# Altium PCB nixie.PcbDoc
Units mil, origin at the board's own origin, x right, y up, seen from the top; angles counter-clockwise.
Board outline 3200 x 3800 mil, 2 copper layers (Top Layer, Bottom Layer); 49 components, 41 nets, 157 pads, 7 vias.
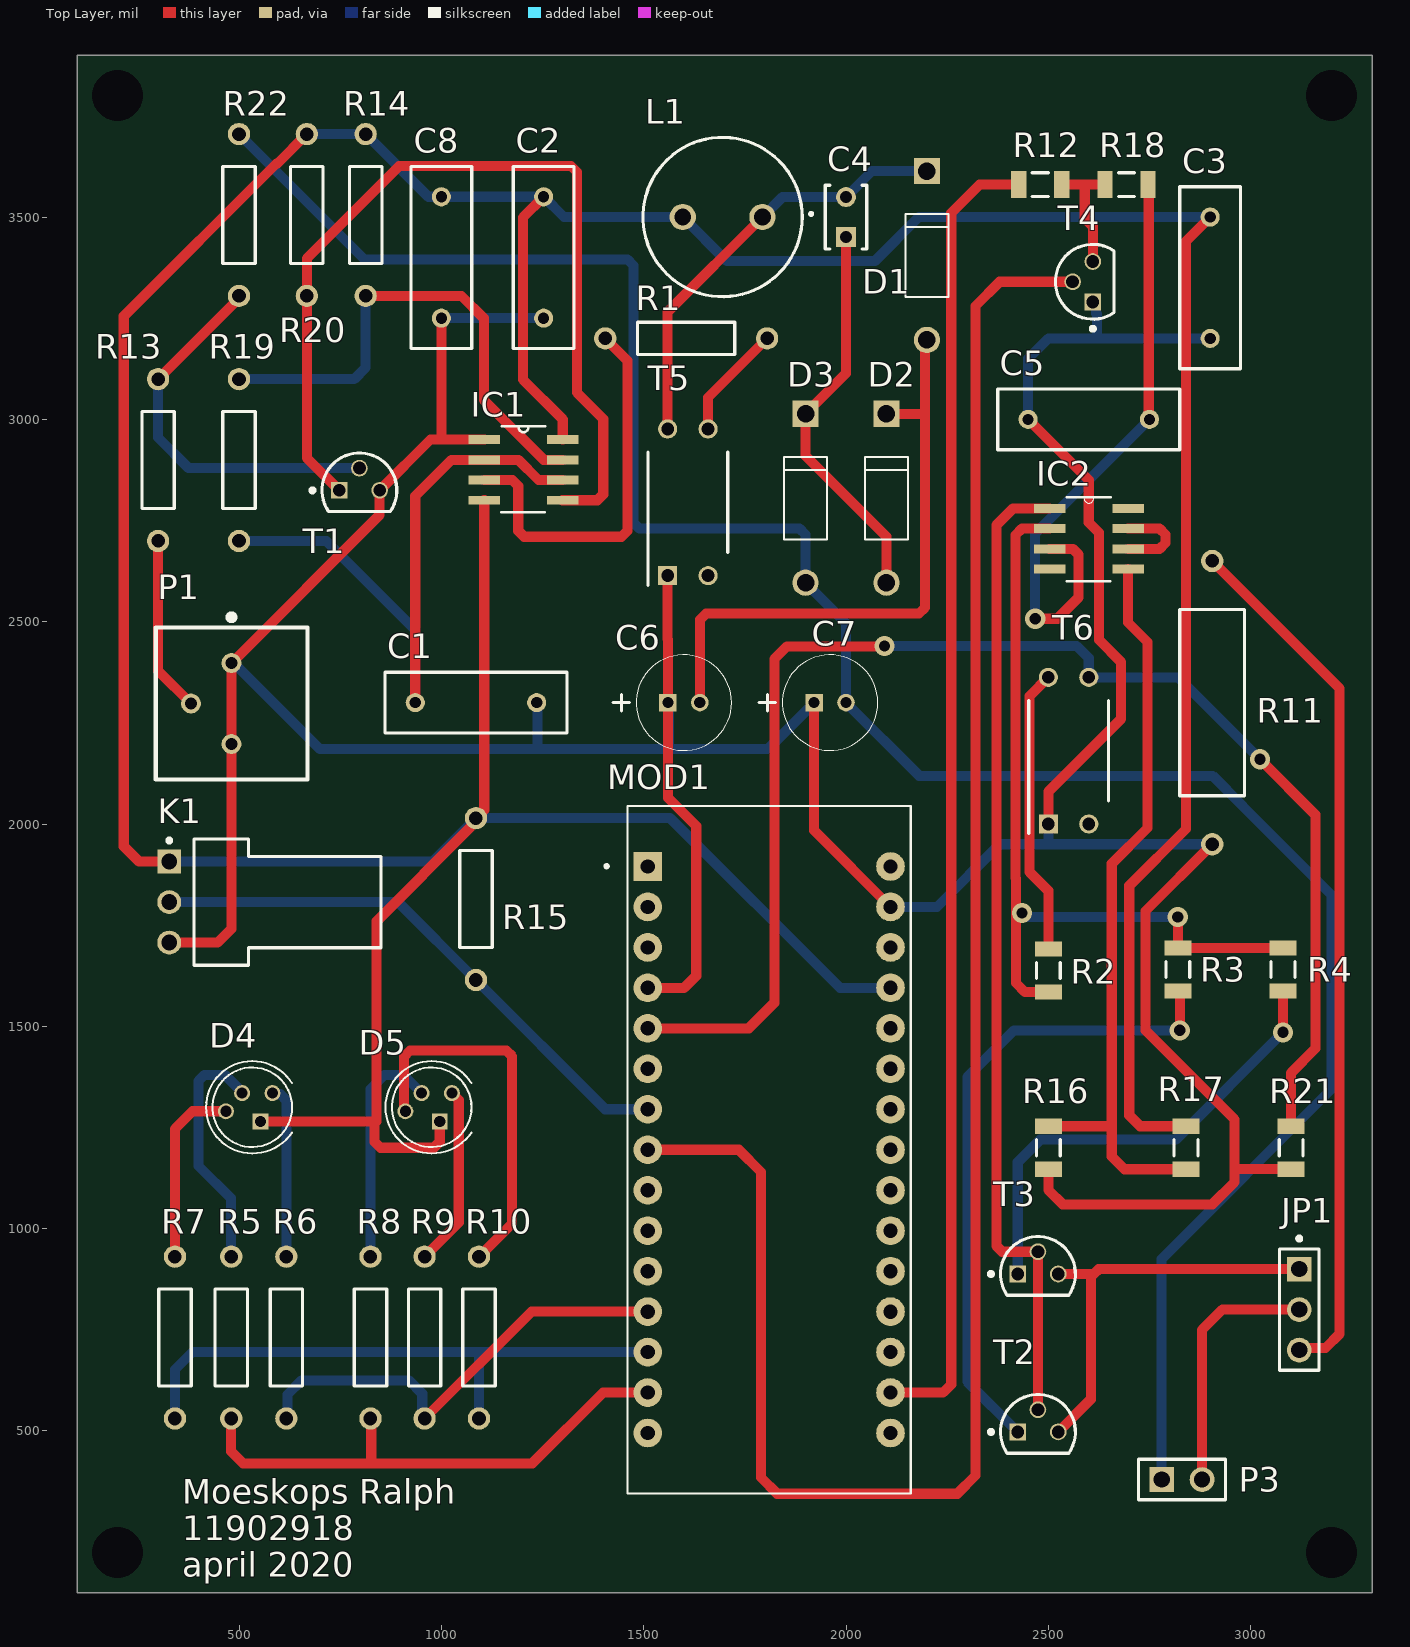
[diagram p0: Top Layer view]
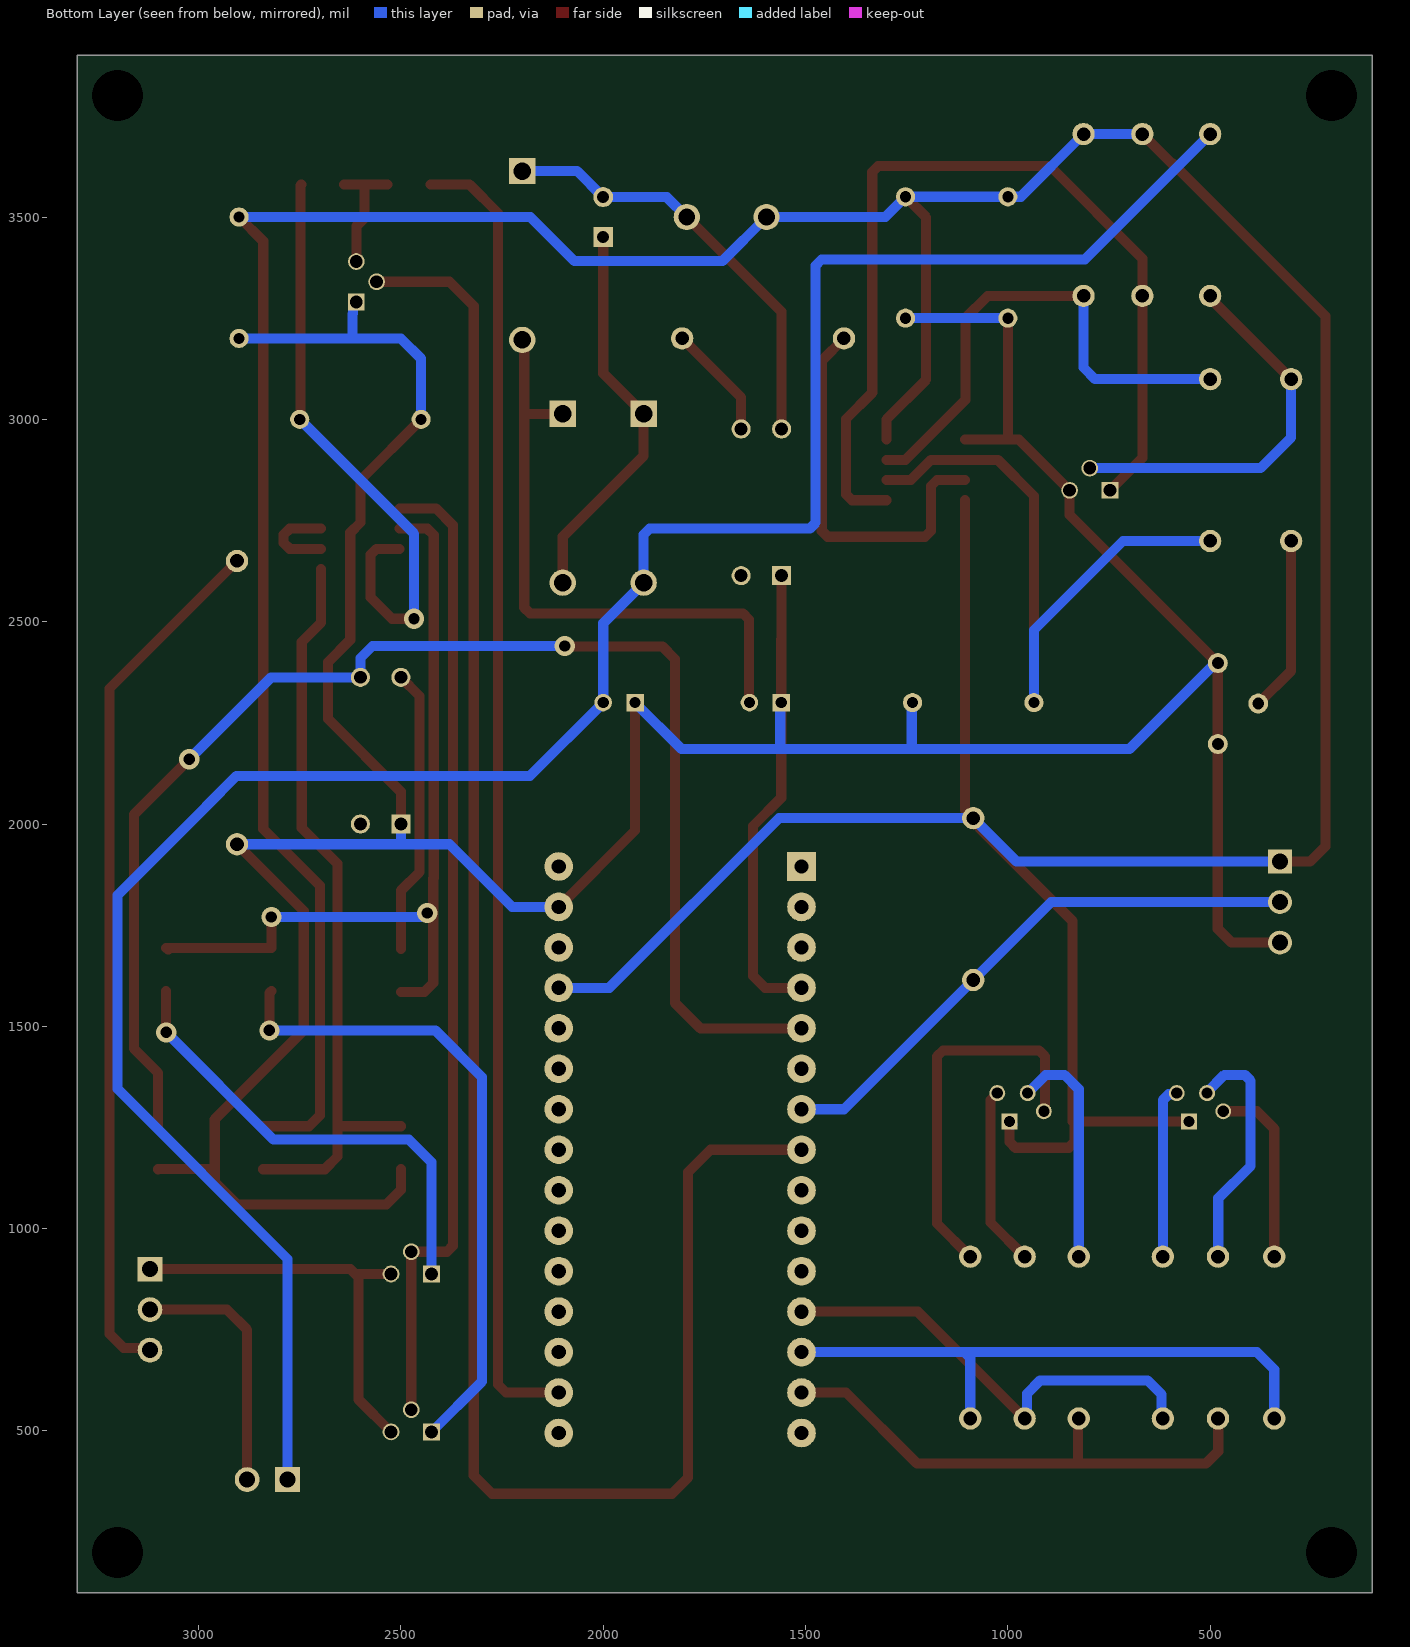
[diagram p1: Bottom Layer view, seen from below]

## Layer stack, top to bottom
Top Solder: solder mask 0.4, Solder Resist, Dk 3.5
Top Layer: signal copper 1.4
Dielectric 1: dielectric 12.6, FR-4, Dk 4.8
Bottom Layer: signal copper 1.4
Bottom Solder: solder mask 0.4, Solder Resist, Dk 3.5

## Board outline
100,100 3300,100 3300,3900 100,3900
cut-out: 5100,700

## Design rules (kind name [scope] priority, off if disabled: settings)
Clearance [All] p1: gap=10 ignorepadtopadclearanceinfootprint=FALSE except(0: Arc-Hole Track-Hole SMDPad-Hole THPad-Hole Via-Hole Fill-Hole Poly-Hole Region-Hole Text-Hole)
HoleSize HoleSize_1 [All] p1: absolutevalues=TRUE maxlimit=200 minlimit=1 maxpercent=80.000 minpercent=20.000
HoleSize [All] p2: absolutevalues=TRUE maxlimit=200 minlimit=1 maxpercent=80.000 minpercent=20.000
PolygonConnect [All] p1: connectstyle=Relief reliefconductorwidth=10 reliefentries=4 polygonreliefangle="90 Angle" airgapwidth=10
RoutingVias [All] p1: holewidth=28 width=50 viastyle="Through Hole" minholewidth=28 minwidth=50 maxholewidth=28 maxwidth=50
SolderMaskExpansion [All] p1: expansion=4 istentingtop=FALSE
Width [All] p1: maxlimit=50 minlimit=25 preferedwidth=25 minimp=50.000000 maximp=50.000000 favimp=50.000000
29 further rules are at their usual default settings.

## Classes and differential pairs
component class Sheet1: C1 C2 C3 C4 C5 C6 C7 C8 D1 D2 D3 IC1 IC2 K1 L1 P3 R1 R2 R3 R4 R5 R6 R7 R8 R9 R10 R11 R12 R13 R14 R15 R16 R17 R18 R19 R20 R21 R22 T1 T2 T4

## Components (designator, comment, footprint, x,y, rotation, side; value= is the part's Value field where it differs from the comment)
C1 "Cap" RAD-0.3 1085.58,2300 r180 top value=1uF
C2 "Cap" RAD-0.3 1252.86,3400 r90 top value=1uF
C3 "Cap" RAD-0.3 2900,3350 r90 top value=1uF
C4 "100V" "Ceramic Capacitor" 2000,3500 r90 top value=1uF
C5 "Cap" RAD-0.3 2600,3000 r0 top value=1uF
C6 "200V" "electrolytic capacitor 2.2uf" 1600,2300 r0 top value=1uF
C7 "200V" "electrolytic capacitor 2.2uf" 1961.26,2300 r0 top value=1uF
C8 "Cap" RAD-0.3 1000,3400 r90 top value=1uF
D1 "MUR160G" MUR160G 2200,3400 r90 top
D2 "MUR160G" MUR160G 2100,2800 r90 top
D3 "MUR160G" MUR160G 1900,2800 r90 top
D4 "RGB LED" "rgb leds" 16132.67,2160 r0 top
D5 "RGB LED" "rgb leds" 16576.09,2160 r0 top
IC1 "M7555" M7555's 1203,2875 r0 top
IC2 "LM6142" LM6142's 2600,2700 r0 top
JP1 "22-28-4033" MOLX-22-28-4033_V 3120,800 r270 top
K1 "61900319521" K1 620.35,1809.48 r90 top
L1 "Inductor" ELC08D470E 1700,3500 r180 top value=47uH
MOD1 "arduino" "ARDUINO NANO" 1800,1200 r0 top
P1 "Component_1" Pot 479.38,2300 r90 top
P3 "TSW-102-26-L-S" SMTC-TSW-102-26-XX-S 2780,380 r0 top
R1 "1%" Resistor 1600,3200 r0 top value=1K
R2 "1%" "SMD resistor" 2500,1638.15 r270 top value=1K
R3 "Res2" "SMD resistor" 2820,1640 r270 top value=1K
R4 "Res2" "SMD resistor" 3080,1640 r270 top value=1K
R5 "Res2" Resistor 480.69,725.83 r90 top value=1K
R6 "Res2" Resistor 616.95,725.83 r90 top value=1K
R7 "Res2" Resistor 341.73,725.83 r90 top value=1K
R8 "Res2" Resistor 824.86,725.83 r90 top value=1K
R9 "Res2" Resistor 958.52,725.83 r90 top value=1K
R10 "Res2" Resistor 1093.07,725.83 r90 top value=1K
R11 "1W" "RESISTOR 1W" 2900,2300 r90 top value=1K
R12 "1%" "SMD resistor" 2480,3580 r180 top value=1K
R13 "1%" Resistor 300,2894.42 r90 top value=1K
R14 "Res2" Resistor 812.98,3500 r90 top value=1K
R15 "Res2" Resistor 1085.58,1809.48 r90 top value=1K
R16 "1%" "SMD resistor" 2500,1200 r90 top value=1K
R17 "1%" "SMD resistor" 2840,1200 r90 top value=1K
R18 "1%" "SMD resistor" 2693.15,3580 r0 top value=1K
R19 "Res2" Resistor 500,2894.42 r90 top value=1K
R20 "Res2" Resistor 667.6,3500 r90 top value=1K
R21 "1%" "SMD resistor" 3100,1200 r90 top value=1K
R22 "1%" Resistor 500,3500 r90 top value=1K
T1 "BC547B" BC547B 797.51,2859.48 r0 top
T2 "MPSA42" MPSA42 2474.36,532.64 r0 top
T3 "MPSA42" MPSA42 2474.36,922.99 r0 top
T4 "2N7000" 2N7000 2580,3340 r90 top
T5 "IRLD110" IRLD110 1609.21,2800 r90 top
T6 "IRLD110" IRLD110 2550,2186.18 r90 top

## Footprints (in the part's own frame and the unit in brackets; to place one, negate y for a bottom-side part, rotate by r counter-clockwise, add the part's x,y. Pads: shape width x height; smd on the part's side, far side on the other; paste and mask are expansions set on the pad)
2N7000 [mm]
  rect 1.05x1.05 hole 0.8: 1(-1.27,-0.762)
  round 1.05 hole 0.8: 2(0,0.508) 3(1.27,-0.762)
  silkscreen extent -3.07,-2.1 2.35,1.58, body extent -2.35,-2.1 2.36,1.6, height 7.87
"ARDUINO NANO" [mm]
  rect 1.8x1.8 hole 0.9: 1(-7.366,17.653)
  round 1.8 hole 0.9: 2(-7.366,15.113) 3(-7.366,12.573) 4(-7.366,10.033) 5(-7.366,7.493) 6(-7.366,4.953) 7(-7.366,2.413) 8(-7.366,-0.127) 9(-7.366,-2.667) 10(-7.366,-5.207) 11(-7.366,-7.747) 12(-7.366,-10.287) 13(-7.366,-12.827) 14(-7.366,-15.367) 15(-7.366,-17.907) 16(7.874,-17.907) 17(7.874,-15.367) 18(7.874,-12.827) 19(7.874,-10.287) 20(7.874,-7.747) 21(7.874,-5.207) 22(7.874,-2.667) 23(7.874,-0.127) 24(7.874,2.413) 25(7.874,4.953) 26(7.874,7.493) 27(7.874,10.033) 28(7.874,12.573) 29(7.874,15.113) 30(7.874,17.653)
  silkscreen extent -10.05,-21.72 9.14,21.46
BC547B [mm]
  rect 1.05x1.05 hole 0.8: 1(-1.27,-0.889)
  round 1.05 hole 0.8: 2(0,0.508) 3(1.27,-0.889)
  silkscreen extent -3.07,-2.22 2.35,1.46, body extent -2.35,-2.22 2.36,1.47, height 7.87
"Ceramic Capacitor" [mm] "Radial Cap, Thru-Hole; 2 Leads; 0.3 in Pin Spacing"
  rect 1.25x1.25 hole 0.75: 1(-1.25,0)
  round 1.25 hole 0.75: 2(1.25,0)
  silkscreen extent -2,-1.3 2,1.3, body extent -2,-1.3 2,1.3, height 5.6
ELC08D470E [mm] "Chip Inductor, Body 1.0x0.5mm, IPC High Density"
  round 1.65 hole 1.05: 1(-2.373,0) 2(2.627,0)
  silkscreen extent -5.52,-5 5.12,5
"electrolytic capacitor 2.2uf" [mm] "Radial Cap, Thru-Hole; 2 Leads; 0.3 in Pin Spacing"
  rect 1.1x1.1 hole 0.7: 1(-1.016,0)
  round 1.1 hole 0.7: 2(0.984,0)
  silkscreen extent -4.46,-3 2.98,3
IRLD110 [mm]
  rect 1.2x1.2 hole 0.8: 1(-4.729,1.27)
  round 1.2 hole 0.8: 2(4.475,-1.27) 3(4.475,1.27) ""(-4.729,-1.27)
  silkscreen extent -5.33,-2.5 3.02,2.5, body extent -4.88,-2.45 4.63,2.45, height 3.37
K1 [mm]
  rect 1.5x1.5 hole 1: 1(2.474,7.437)
  round 1.5 hole 1: 2(-0.066,7.437) 3(-2.606,7.437)
  silkscreen extent -4.03,-5.86 3.93,7.56, body extent -3.88,-5.73 3.74,7.79, height 5.83
LM6142's [mil]
  rect 78x22 smd: 1(-97,80) 2(-97,30) 3(-97,-20) 4(-97,-70) 5(97,-70) 6(97,-20) 7(97,30) 8(97,80)
  silkscreen extent -55,-100 54,108
M7555's [mil]
  rect 78x22 smd: 1(-97,75) 2(-97,25) 3(-97,-25) 4(-97,-75) 5(97,-75) 6(97,-25) 7(97,25) 8(97,75)
  silkscreen extent -55,-105 54,108
MOLX-22-28-4033_V [mm] "THD, 3-Leads, Body 7.62x2.49mm, Pitch 2.54mm"
  rect 1.55x1.55 hole 1.02: 1(-2.54,0)
  round 1.55 hole 1.02: 2(0,0) 3(2.54,0)
  silkscreen extent -4.58,-1.24 3.81,1.25, body extent -3.81,-1.24 3.81,1.24, height 8.38
MPSA42 [mm]
  rect 1.05x1.05 hole 0.8: 1(-1.27,-0.889)
  round 1.05 hole 0.8: 2(0,0.508) 3(1.27,-0.889)
  silkscreen extent -3.07,-2.22 2.35,1.46, body extent -2.35,-2.22 2.36,1.47, height 7.87
MUR160G [mm]
  round 1.65 hole 1.1: 1(-5.173,0)
  rect 1.65x1.65 hole 1.1: 2(5.427,0)
  silkscreen extent -2.47,-1.35 2.73,1.35
Pot [mm]
  round 1.25 hole 0.75: 1(2.479,-0.046) 2(-0.061,2.494) 3(-2.601,-0.046)
  silkscreen extent -4.83,-4.83 5.53,4.7, body extent -4.83,-4.83 4.75,4.75, height 10.9
RAD-0.3 [mm] "Radial Cap, Thru-Hole; 2 Leads; 0.3 in Pin Spacing"
  round 1.2 hole 0.7: 1(-3.81,0) 2(3.81,0)
  silkscreen extent -5.72,-1.91 5.71,1.9
Resistor [mm]
  round 1.4 hole 0.85: 1(-4.953,0) 2(5.207,0)
  silkscreen extent -2.92,-1.02 3.17,1.02
"RESISTOR 1W" [mm]
  round 1.4 hole 0.85: 1(-8.89,-0.127) 2(8.89,-0.127)
  silkscreen extent -5.84,-2.16 5.84,1.91
"rgb leds" [mm]
  round 1 hole 0.7: B(-396.875,-20.955) G(-397.891,-22.098) R(-394.97,-20.955)
  rect 1x1 hole 0.7: C(-395.732,-22.733)
  silkscreen extent -399.14,-24.74 -393.74,-18.94
"SMD resistor" [mm] "Axial Device, Thru-Hole; 2 Leads; 0.4 in Pin Spacing"
  rect 0.95x1.7 smd: 1(-1.35,0) 2(1.35,0)
  silkscreen extent -0.5,-0.75 0.5,0.75, body extent -1.67,-0.87 1.67,0.87, height 0.75
SMTC-TSW-102-26-XX-S [mm] ".025 SQ Post Terminal Strip Assembly, 1x2 Pins, Vertical, 2.54mm Pitch, Male"
  rect 1.55x1.55 hole 1.02: 1(0,0)
  round 1.55 hole 1.02: 2(2.54,0)
  silkscreen extent -1.46,-1.27 4,1.27, body extent -1.4,-1.27 3.81,1.27, height 8.38

## Part data
C1 C2 C3 C5 C8: library part Capacitor, "Capacitor", LatestRevisionDate=17-Jul-2002, LatestRevisionNote="Re-released for DXP Platform.", PackageDescription="Radial Cap, Thru-Hole; 2 Leads; 0.3 in Pin Spacing", PackageReference=RAD-0.3, Published=8-Jun-2000, Publisher="Altium Limited"
C4: library part Capacitor, "Capacitor / 100V", LatestRevisionDate=17-Jul-2002, LatestRevisionNote="Re-released for DXP Platform.", PackageDescription="Radial Cap, Thru-Hole; 2 Leads; 0.3 in Pin Spacing", PackageReference=RAD-0.3, Published=8-Jun-2000, Publisher="Altium Limited"
C6 C7: library part C1uF, "Capacitor", LatestRevisionDate=17-Jul-2002, LatestRevisionNote="Re-released for DXP Platform.", PackageDescription="Radial Cap, Thru-Hole; 2 Leads; 0.3 in Pin Spacing", PackageReference=RAD-0.3, Published=8-Jun-2000, Publisher="Altium Limited"
D1 D2 D3: library part Diode, "Diode", Manufacturer="ON Semiconductor", ComponentLink1Description="Manufacturer URL", ComponentLink1URL=http://www.onsemi.com/, ComponentLink2Description=Datasheet, ComponentLink2URL=http://www.onsemi.com/pub_link/Collateral/MUR120-D.PDF, ComponentLink3Description="Package Specification", ComponentLink3URL=http://www.onsemi.cn/pub_link/Collateral/59-10.PDF, DatasheetVersion="Rev. 12", IFSM Max (A)=35, Manufacturer Part Number=MUR160G, Mounting Technology="Through Hole", PackageDescription="2-Pin, Axial Lead, Diameter 2.35 mm", PackageReference=AXIAL_LEAD-2-59-10, PackageVersion="Rev. U, 02/2005", Packing="Bulk Bag", PartNumber=MUR160G, RoHS=TRUE, Type=Ultrafast, VRRM Max (V)=600
D4 D5: "RGB Led"
IC1: "IC", Case/Package=SOIC, Frequency=1MHz, High Level Output Current=-800uA, Low Level Output Current=20mA, Manufacturer=Intersil, Manufacturer Part Number=ICM7555CBAZ-T, Max Operating Temperature=70°C, Max Supply Voltage=18V, Min Operating Temperature=0°C, Min Supply Voltage=2V, Operating Supply Current=60uA, Package="SOIC-8 Intersil", Package Quantity=2500, Availability=Unavailable, Category="Clock and Timing", ComponentLink1Description=https://datasheet.ciiva.com/6667/fn2867-6667943.pdf?src-supplier=Digi-Key, ComponentLink1URL=https://datasheet.ciiva.com/6667/fn2867-6667943.pdf?src-supplier=Digi-Key, ComponentLink2Description=https://datasheet.ciiva.com/6667/fn2867-6667945.pdf?src-supplier=Digi-Key, ComponentLink2URL=https://datasheet.ciiva.com/6667/fn2867-6667945.pdf?src-supplier=Digi-Key, ComponentLink3Description=https://datasheet.ciiva.com/6667/fn2867-6667947.pdf?src-supplier=Digi-Key, ComponentLink3URL=https://datasheet.ciiva.com/6667/fn2867-6667947.pdf?src-supplier=Digi-Key, Contact Plating=Tin,Matte, Lead Free="Lead Free", MF="Renesas Electronics", Mount="Surface Mount", MP=ICM7555CBAZ, Number of Pins=8, Number of Timers/Counters=1, Packaging="Tape and Reel", Price=None, Pricing 1="2500=0,25401, 5000=0,24643, 10000=0,23930, 15000=0,23256, 25000=0,22947 (USD)", Radiation Hardening=No, RoHS=Yes, SnapEDA_Link=https://www.snapeda.com/parts/ICM7555CBAZ/Renesas%20Electronics%20America%20Inc./view-part/931/?ref=snap, Supplier 1=Avnet, Supplier Part Number 1=ICM7555CBAZ-T
IC2: library part LM6412, "IC", Manufacturer="TI National Semiconductor", Manufacturer Part Number=LM6142AIM, Package Reference=D0008A, PackageTopMarking=NSZXTT*LM614*2AIM, PowerWise=N, Code_IPC=SOIC127P600-8, Code_JEDEC=MS-012-AA, ComponentLink1Description="Datasheet URL", ComponentLink1URL=http://www.ti.com/general/docs/lit/getliterature.tsp?genericPartNumber=LM6142&fileType=pdf, CompType=Amplifiers, PackageDescription="SOIC Narrow, 4.9 x 3.9 x 1.45mm, 8 Lead, 1.27mm Pitch", PinCount=8, RoHS=N
JP1: library part CMP-1676-00001-5, "Male Header, Pitch 2.54 mm, 1 x 3 Position, Height 8.38 mm, Tail Length 3.18 mm, RoHS, Bulk", Colour=Black, Current Rating="4 A", Manufacturer=Molex, Max Operating Temperature="75 degC", Min Operating Temperature="0 degC", Package Quantity=1, Voltage Rating="250 V", ComponentLink1Description="Manufacturer URL", ComponentLink1URL=http://www.molex.com/, ComponentLink2Description=Datasheet, ComponentLink2URL=http://www.molex.com/pdm_docs/sd/022284033_sd.pdf, Contact Finish=Gold, Contact Material=Brass, Contact Plating=Gold, DatasheetVersion="Rev. G, 01/2012", Height="8.38 mm", Lead Pitch="0.1 inch", Length="7.62 mm", Mount="Through Hole", Mounting Technology="Through Hole", PackageDescription="Male Header, Pitch 2.54 mm, 1 x 3 Position, Height 8.38 mm, Tail Length 3.18 mm", PackageReference=22-28-4033, Packaging=Bulk, Pins=3, REACH SVHC=Unknown, RoHSCompliant=true, Rows=1
K1: library part K1, "Connector", Contact Resistance=20mOhm, Manufacturer="Wurth Electronics", Operating Temperature=-40to105degC, Working Voltage=250VAC, Datasheet URL=https://katalog.we-online.de/em/datasheet/6190xx19521.pdf, Gender=Male, Manufacturer Part Number=61900319521, Manufacturer URL=http://www.we-online.de, Mounting Technology=THT, Orientation=RightAngled, Package Reference=61900319521, Packaging=Bag, Part Number=61900319521, Pitch=2.54mm, Position=1x3, Publisher=WurthElektronik
P3: library part CMP-1024-00330-1, "0.025\" SQ Post Header, Through-hole, Vertical, -55 to 125 degC, 2.54 mm Pitch, 2-Pin, Male, RoHS", Manufacturer=Samtec, Temperature Range="-55 to 125 degC", ComponentLink1Description="Manufacturer URL", ComponentLink1URL=http://www.samtec.com, ComponentLink2Description=Datasheet, ComponentLink2URL=http://www.samtec.com/documents/webfiles/pdf/TSW_TH.PDF, ComponentLink3Description="Package Specification", ComponentLink3URL=http://www.samtec.com/documents/webfiles/cpdf/TSW-XXX-XX-XXX-X-XX-XXX-MKT.pdf, DatasheetVersion=F-214, Mounting Technology=Through-hole, Orientation=Vertical, PackageDescription=".025[0.64] SQ. Post Terminal Strip Assembly", PackageReference=TSW-102-26-XX-S, PackageVersion="DM, 8/1988", PartNumber=TSW-102-26-L-S, Pitch="2.54 mm", RoHS=True
R1 R11 R12 R16 R17 R18 R21 R22: library part Resistor, "Resistor", LatestRevisionDate=17-Jul-2002, LatestRevisionNote="Re-released for DXP Platform.", PackageDescription="Axial Device, Thru-Hole; 2 Leads; 0.4 in Pin Spacing", PackageReference=AXIAL-0.4, Published=8-Jun-2000, Publisher="Altium Limited"
R2 R13: library part Res2, "Resistor", LatestRevisionDate=17-Jul-2002, LatestRevisionNote="Re-released for DXP Platform.", PackageDescription="Axial Device, Thru-Hole; 2 Leads; 0.4 in Pin Spacing", PackageReference=AXIAL-0.4, Published=8-Jun-2000, Publisher="Altium Limited"
R3 R4 R5 R6 R7 R8 R9 R10 R14 R15 R19 R20: "Resistor", LatestRevisionDate=17-Jul-2002, LatestRevisionNote="Re-released for DXP Platform.", PackageDescription="Axial Device, Thru-Hole; 2 Leads; 0.4 in Pin Spacing", PackageReference=AXIAL-0.4, Published=8-Jun-2000, Publisher="Altium Limited"
T1 T2 T3: "Transistor", Manufacturer="ON Semiconductor / Fairchild", ComponentLink1Description="Manufacturer URL", ComponentLink1URL=http://www.onsemi.com/, ComponentLink2Description=Datasheet, ComponentLink3Description="Package Specification", ComponentLink3URL=http://www.onsemi.cn/pub_link/Collateral/2N6426-D.PDF, Mounting Technology="Through Hole", PackageDescription="3-Pin Transistor Outline, Body 4.825 x 3.685 mm, Pitch 1.27 mm", PackageReference=TO-92-3-29-11_AM_SL, PackageVersion="Rev. AM", Packing="Bulk Box", Polarity=NPN, RoHS=FALSE
  T1: ComponentLink2URL=http://www.onsemi.com/pub_link/Collateral/BC546-D.PDF, DatasheetVersion="Rev. 7", fT Min (MHz)=150, IC Continuous (A)=0.1, Manufacturer Part Number=BC547B, PartNumber=BC547B
  T2 T3: ComponentLink2URL=http://www.onsemi.cn/pub_link/Collateral/MPSA42-D.PDF, DatasheetVersion="Rev. 8", fT Min (MHz)=50, IC Continuous (A)=0.5, Manufacturer Part Number=MPSA42, Note1=0, PartNumber=MPSA42
T4: library part IC2N7000, "Transistor", Manufacturer="ON Semiconductor / Fairchild", Package Type=TO-92, Channel Polarity="N Channel", Ciss Typ (pF)=60, ComponentLink1Description="Manufacturer URL", ComponentLink1URL=http://www.onsemi.com/, ComponentLink2Description=Datasheet, ComponentLink2URL=http://www.onsemi.com/pub_link/Collateral/2N7000-D.PDF, ComponentLink3Description="Package Specification", ComponentLink3URL=http://www.onsemi.cn/pub_link/Collateral/2N6426-D.PDF, Configuration=Single, Coss Typ (pF)=25, Crss Typ (pF)=5, DatasheetVersion="Rev. 8", ID Max (A)=0.2, Manufacturer Part Number=2N7000, Mounting Technology="Through Hole", PackageDescription="3-Pin Transistor Outline, Body 4.825 x 3.685 mm, Pitch 1.27 mm", PackageReference=TO-92-3-29-11_AM_SL, PackageVersion="Rev. AM", Packing="Bulk Box", PartNumber=2N7000, PD Max (W)=0.35, V(BR)DSS Min (V)=60, VGS Max (V)=20, VGS(th) Max (V)=3
T5 T6: "Transistor", Supplier Part Number 1=IRLD110PBF-ND, Supplier 1=Digi-Key
L1: Code_IEC=1005, Code_JEITA=0402, LatestRevisionDate=29-May-2009, LatestRevisionNote="IPC-7351 Footprint Added.", PackageDescription="Chip Inductor", PackageReference=0402-A, Published=8-Jun-2000, Publisher="Altium Limited"

## Free pads (board coordinates)
  round 60 hole 126: 2(200,3800) 3(200,200) 4(3200,200) 5(3200,3800)

## Via types
v1: diameter 50, hole 28, Top Layer to Bottom Layer, 7 vias

## Nets (pads, with @x,y where several pads share a name; then routed paths per layer and width w, separated by ;. In a path a pad name is that pad's centre, name@x,y a point inside that pad or via, vN(x,y) a via of type N, cw(c..) or ccw(c..) an arc to the next point about the centre after c; other vN are vias at no path point)
+3V3: MOD1.17 R12.2 | length 3249.1
  Top Layer w25: MOD1.17 2240,595 2260,615 2260,3510 2330,3580 2420,3580 R12.2
+5V: C2.2 C3.2 C8.2 D4.C D5.C IC1.4 IC1.8 K1.1 L1.2 MOD1.27 R14.2 R15.2 R17.2 R20.2 | length 11818
  Top Layer w25: K1.1 253.13,1906.87 215,1945 215,3255 592.4,3632.4 595,3632.4 R20.2 ; D4.C 840,1265 840,1760 1070.52,1990.52 1070.52,1991.27 1085.58,2006.33 R15.2 1106,2034.9 IC1.4 ; 835,1265 835,1214.64 849.64,1200 981.45,1200 996.09,1214.64 D5.C ; C2.2 1202,3499.14 1202,3098 1300,3000 IC1.8 ; R17.2 2726.85,1253.15 2700,1280 2700,1847.74 2840,1987.74 2840,3440 C3.2
  Bottom Layer w25: K1.1 977.97,1906.87 R15.2 1565.52,2014.48 1985,1595 MOD1.27 ; R20.2 R14.2 967.99,3550 C8.2 C2.2 1302.86,3500 L1.2 1705.58,3391 2071,3391 2180,3500 C3.2 ; D5.C@988.9,1257.81 D5.C
+150V: C7.2 D3.1 P3.1 R22.2 | length 5654.8
  Bottom Layer w25: R22.2 810,3395 1460.36,3395 1475,3380.36 1475,2744.64 1489.64,2730 1885.36,2730 1900,2715.36 D3.1 2000,2496.34 C7.2 2181,2119 2906,2119 2980,2045 2980,2044.64 3200,1824.64 3200,1345 2780,925 P3.1
GND: C1.1 C2.1 C3.1 C5.1 C6.1 C7.1 C8.1 IC1.1 K1.3 MOD1.4 MOD1.29 P1.1 P1.3 R11.1 R16.1 R21.1 T1.3 T4.1 T5.1 T6.1 | length 10291.9
  Top Layer w25: K1.3 446.87,1706.87 481.19,1741.19 P1.3 P1.1 847.51,2763.93 T1.3@847.51,2827.51 ; T1.3 973.03,2950 1000.3,2950 ; C8.1 1000,2950.3 1000.3,2950 ; IC1.1 1000.3,2950 ; MOD1.4 1600,1595 1630,1625 1630,1995 1560,2065 C6.1 1560,2456 1559.21,2456.79 T5.1 ; C7.1 1921.26,1983.74 MOD1.29 ; C5.1 2600,2850 2600,2745 2625,2720 2625,2455 2680,2400 2680,2260 2500,2080 T6.1 ; R16.1 2500,1095.61 2535.61,1060 2905.15,1060 2960,1114.85 2960,1147.73 ; R11.1 2740,1785 2740,1490 2960,1270 2960,1147.73 ; R21.1 3099.12,1147.73 2960,1147.73
  Bottom Layer w25: P1.1 487.4,2397.6 700,2185 1237.55,2185 ; C8.1 C2.1 ; C1.1 1237.55,2298.03 1237.55,2185 ; C6.1 1562.56,2297.44 1562.56,2185 ; C7.1 1806.26,2185 1562.56,2185 ; MOD1.29 2225,1795 2380,1950 2497.74,1950 ; C5.1 2450,3150 2500,3200 2613.58,3200 ; T6.1 2500,1952.26 2497.74,1950 ; T4.1 2618.17,3281.83 2618.17,3261.83 2620,3260 2620,3206.42 2613.58,3200 ; C3.1 2613.58,3200 ; R11.1 2497.74,1950 ; 1237.55,2185 1562.56,2185
NetC1_2: C1.2 IC1.2 IC1.6 R19.1 | length 1638.9
  Top Layer w25: C1.2 935.58,2810.58 1025,2900 IC1.2 1190,2900 1240,2850 IC1.6
  Bottom Layer w25: R19.1 715.58,2699.42 935.58,2479.42 C1.2
NetC4_1: C4.1 D2.1 D3.2 | length 978.7
  Top Layer w25: C4.1 2000,3113.66 D3.2 1900,2910 2100,2710 D2.1
NetC4_2: C4.2 D1.2 L1.1 T5.3 | length 1074.5
  Top Layer w25: T5.3 1559.21,3265.79 L1.1
  Bottom Layer w25: L1.1 1842.64,3549.21 C4.2 2064.45,3613.66 D1.2
NetC5_2: C5.2 IC2.3 R18.2 | length 1504.6
  Top Layer w25: v1(2467.5,2507.12) 2522.12,2507.12 2575,2560 2575,2665.36 2560.36,2680 IC2.3 ; R18.2 2748.15,3578.15 2748.15,3001.85 C5.2
  Bottom Layer w25: v1(2467.5,2507.12) 2467.12,2507.5 2467.12,2717.12 C5.2
NetC6_2: C6.2 D1.1 D2.2 | length 1532
  Top Layer w25: C6.2 1639.64,2300.9 1639.64,2505.36 1654.29,2520 2180.36,2520 2195,2534.64 2195,3013.66 ; D2.2 2195,3013.66 ; D1.1 2195,3191.34 2195,3013.66
NetD4_B: D4.B R5.2 | length 605.6
  Top Layer w25: D4.B D4.B@510.42,1332.25
  Bottom Layer w25: R5.2 480,931.52 480,1075 400,1155 400,1365.36 414.64,1380 465,1380 507.67,1337.33 D4.B
NetD4_G: D4.G R7.2 | length 459.8
  Top Layer w25: R7.2 341.73,1246.73 385,1290 D4.G
NetD4_R: D4.R R6.2 | length 428.3
  Bottom Layer w25: D4.R 585.42,1332.25 602.31,1332.25 616.95,1317.61 R6.2
NetD5_B: D5.B R8.2 | length 573.2
  Bottom Layer w25: R8.2 824.86,1344.86 859.64,1379.64 906.45,1379.64 D5.B
NetD5_G: D5.G R10.2 | length 944.9
  Top Layer w25: D5.G 908.34,1292.75 908.34,1302.91 908,1303.25 908,1425.71 922.64,1440.36 1160.36,1440.36 1175,1425.71 1175,1012.76 R10.2
NetD5_R: D5.R R9.2 | length 446.2
  Top Layer w25: R9.2 1043,1015.32 1043,1318.09 D5.R
NetDS18B20_1: 
NetDS18B20_2: 
NetDS18B20_3: 
NetIC1_3: IC1.3 R1.1 | length 981
  Top Layer w25: IC1.3 1175.36,2850 1190,2835.36 1190,2724.64 1204.64,2710 1445.36,2710 1460,2724.64 1460,3145 R1.1
NetIC1_5: IC1.5 R20.1 T1.1 | length 2304
  Top Layer w25: T1.1 667.6,2904.39 R20.1 667.6,3397.6 896,3626 1320.36,3626 1335,3611.36 1335,3066 1400,3001 1400,2814.64 1385.36,2800 IC1.5
NetIC1_7: IC1.7 R14.1 R19.2 | length 1274.9
  Top Layer w25: R14.1 1050,3305 1105,3250 1105,3048 1253,2900 IC1.7
  Bottom Layer w25: R19.2 784.42,3099.42 812.99,3127.99 R14.1
NetIC2_1: IC2.1 T2.2 T3.2 | length 2428.8
  Top Layer w25: T2.2 2474.36,747 T3.2 2386.14,942.99 2371.5,957.64 2371.5,2738.5 2413,2780 IC2.1
NetIC2_2: IC2.2 R2.2 R3.1 R4.1 | length 2017.2
  Top Layer w25: v1@2420,1780 2420,1606.96 2441.96,1585 R2.2 ; v1(2435,1780) 2435,1775 2429.85,1780.15 2420,1780.15 2420,1865.5 2418.88,1866.62 2418.88,2714.23 2434.64,2730 IC2.2 ; v1(2820,1770) R3.1 3071.85,1693.15 3075,1690 3078.15,1693.15 R4.1
  Bottom Layer w25: v1@2451.77,1770 v1(2820,1770)
NetIC2_5: IC2.5 R16.2 R17.1 | length 1861.2
  Top Layer w25: R16.2 2656.72,1253.15 ; IC2.5 2697,2498 2745,2450 2745,1990 2656.74,1901.74 2656.74,1253.12 2656.74,1178.26 2688.15,1146.85 R17.1
NetIC2_6: IC2.6 IC2.7 | length 218.1
  Top Layer w25: IC2.6 2775,2680 2789.64,2694.64 2789.64,2715.36 2775,2730 IC2.7
NetJP1_1: JP1.1 T2.3 T3.3 | length 1027.4
  Top Layer w25: T2.3 2605,578.28 2605,880.59 2612.4,887.99 ; T3.3 2612.4,887.99 ; JP1.1 2624.41,900 2612.4,887.99
NetJP1_2: JP1.2 P3.2 | length 637.8
  Top Layer w25: P3.2 2885,380 2880,385 2880,750 2930,800 JP1.2
NetJP1_3: JP1.3 R11.2 | length 2157
  Top Layer w25: R11.2 3220,2335 3220,740 3185,705 3125,705 JP1.3
NetK1_2: K1.2 MOD1.7 R15.1 | length 1394.5
  Bottom Layer w25: K1.2 893.19,1806.87 R15.1 1405.06,1295 MOD1.7
NetMOD1_5: MOD1.5 R21.2 T6.2 | length 3534.7
  Top Layer w25: MOD1.5 1760,1495 1823,1558 1823,2408 1854,2439 2094,2439 v1(2095,2440) ; v1(3023,2160) 3160,2023 3160,1445 3100,1385 R21.2
  Bottom Layer w25: v1(2095,2440) 2570,2440 2600,2410 T6.2 2820.64,2362.36 v1(3023,2160)
NetMOD1_8: MOD1.8 T4.2 | length 4777.8
  Top Layer w25: MOD1.8 1735,1195 1790,1140 1790,385 1830,345 2275,345 2320,390 2320,3280 2380,3340 T4.2
NetMOD1_12: MOD1.12 R6.1 R9.1 | length 1151.7
  Top Layer w25: R9.1 1222.68,795 MOD1.12
  Bottom Layer w25: R6.1 620,533.88 620,590 655,625 920,625 952.75,592.25 952.75,530.83 955.63,527.95 R9.1
NetMOD1_13: MOD1.13 R7.1 R10.1 | length 1616.5
  Bottom Layer w25: R7.1 341.73,651.73 385,695 1107.72,695 ; 1093.07,670 R10.1 1093.07,680.36 1107.72,695 ; MOD1.13 1107.72,695
NetMOD1_14: MOD1.14 R5.1 R8.1 | length 1314.8
  Top Layer w25: R5.1 480,530.15 480,450 510,420 826.88,420 ; R8.1 826.88,528.82 826.88,420 ; MOD1.14@1515,600 MOD1.14 1400,595 1225,420 826.88,420
NetP1_2: P1.2 R13.1 | length 435.5
  Top Layer w25: R13.1 300,2378.78 P1.2
NetR1_2: R1.2 T5.2 | length 284.2
  Top Layer w25: T5.2 1659.21,3054.21 R1.2
NetR2_1: R2.1 T6.3 | length 709.3
  Top Layer w25: R2.1 2500,1835 2453.88,1881.12 2453.88,2316.24 T6.3
NetR3_2: R3.2 T2.1 | length 1600.4
  Top Layer w25: R3.2 2825,1581.85 v1(2825,1490)
  Bottom Layer w25: T2.1 2300,621.99 2300,1375 2415,1490 v1(2825,1490)
NetR4_2: R4.2 T3.1 | length 1166.7
  Top Layer w25: v1(3080,1485) R4.2
  Bottom Layer w25: T3.1 2424.36,1164.36 2480,1220 2815,1220 v1(3080,1485)
NetR12_1: R12.1 R18.1 T4.3 | length 305.1
  Top Layer w25: R12.1 2540,3580 2590,3580 ; T4.3 2610,3477.21 2590,3497.21 2590,3580 ; R18.1 2590,3580
NetR13_2: R13.2 R22.1 T1.2 | length 961.6
  Top Layer w25: R13.2 500,3299.42 R22.1
  Bottom Layer w25: R13.2 300,2955 375.52,2879.48 T1.2
pads on no net: IC2.4 IC2.8 MOD1.1 MOD1.2 MOD1.3 MOD1.6 MOD1.9 MOD1.10 MOD1.11 MOD1.15 MOD1.16 MOD1.18 MOD1.19 MOD1.20 MOD1.21 MOD1.22 MOD1.23 MOD1.24 MOD1.25 MOD1.26 MOD1.28 MOD1.30 T5. T6.

## Silkscreen, mask and mechanical layers (free items; w line width, h text height)
Top Overlay:
  text "Moeskops Ralph / 11902918 / april 2020" at 360,140 h60
bordoutline:
  the board outline again, w10